# Altium PCB KEYBOARD.PcbDoc
Units mil, origin at the board's own origin, x right, y up, seen from the top; angles counter-clockwise.
Board outline 3860 x 3890 mil, 2 copper layers (Top Layer, Bottom Layer); 62 components, 55 nets, 236 pads, 70 vias.
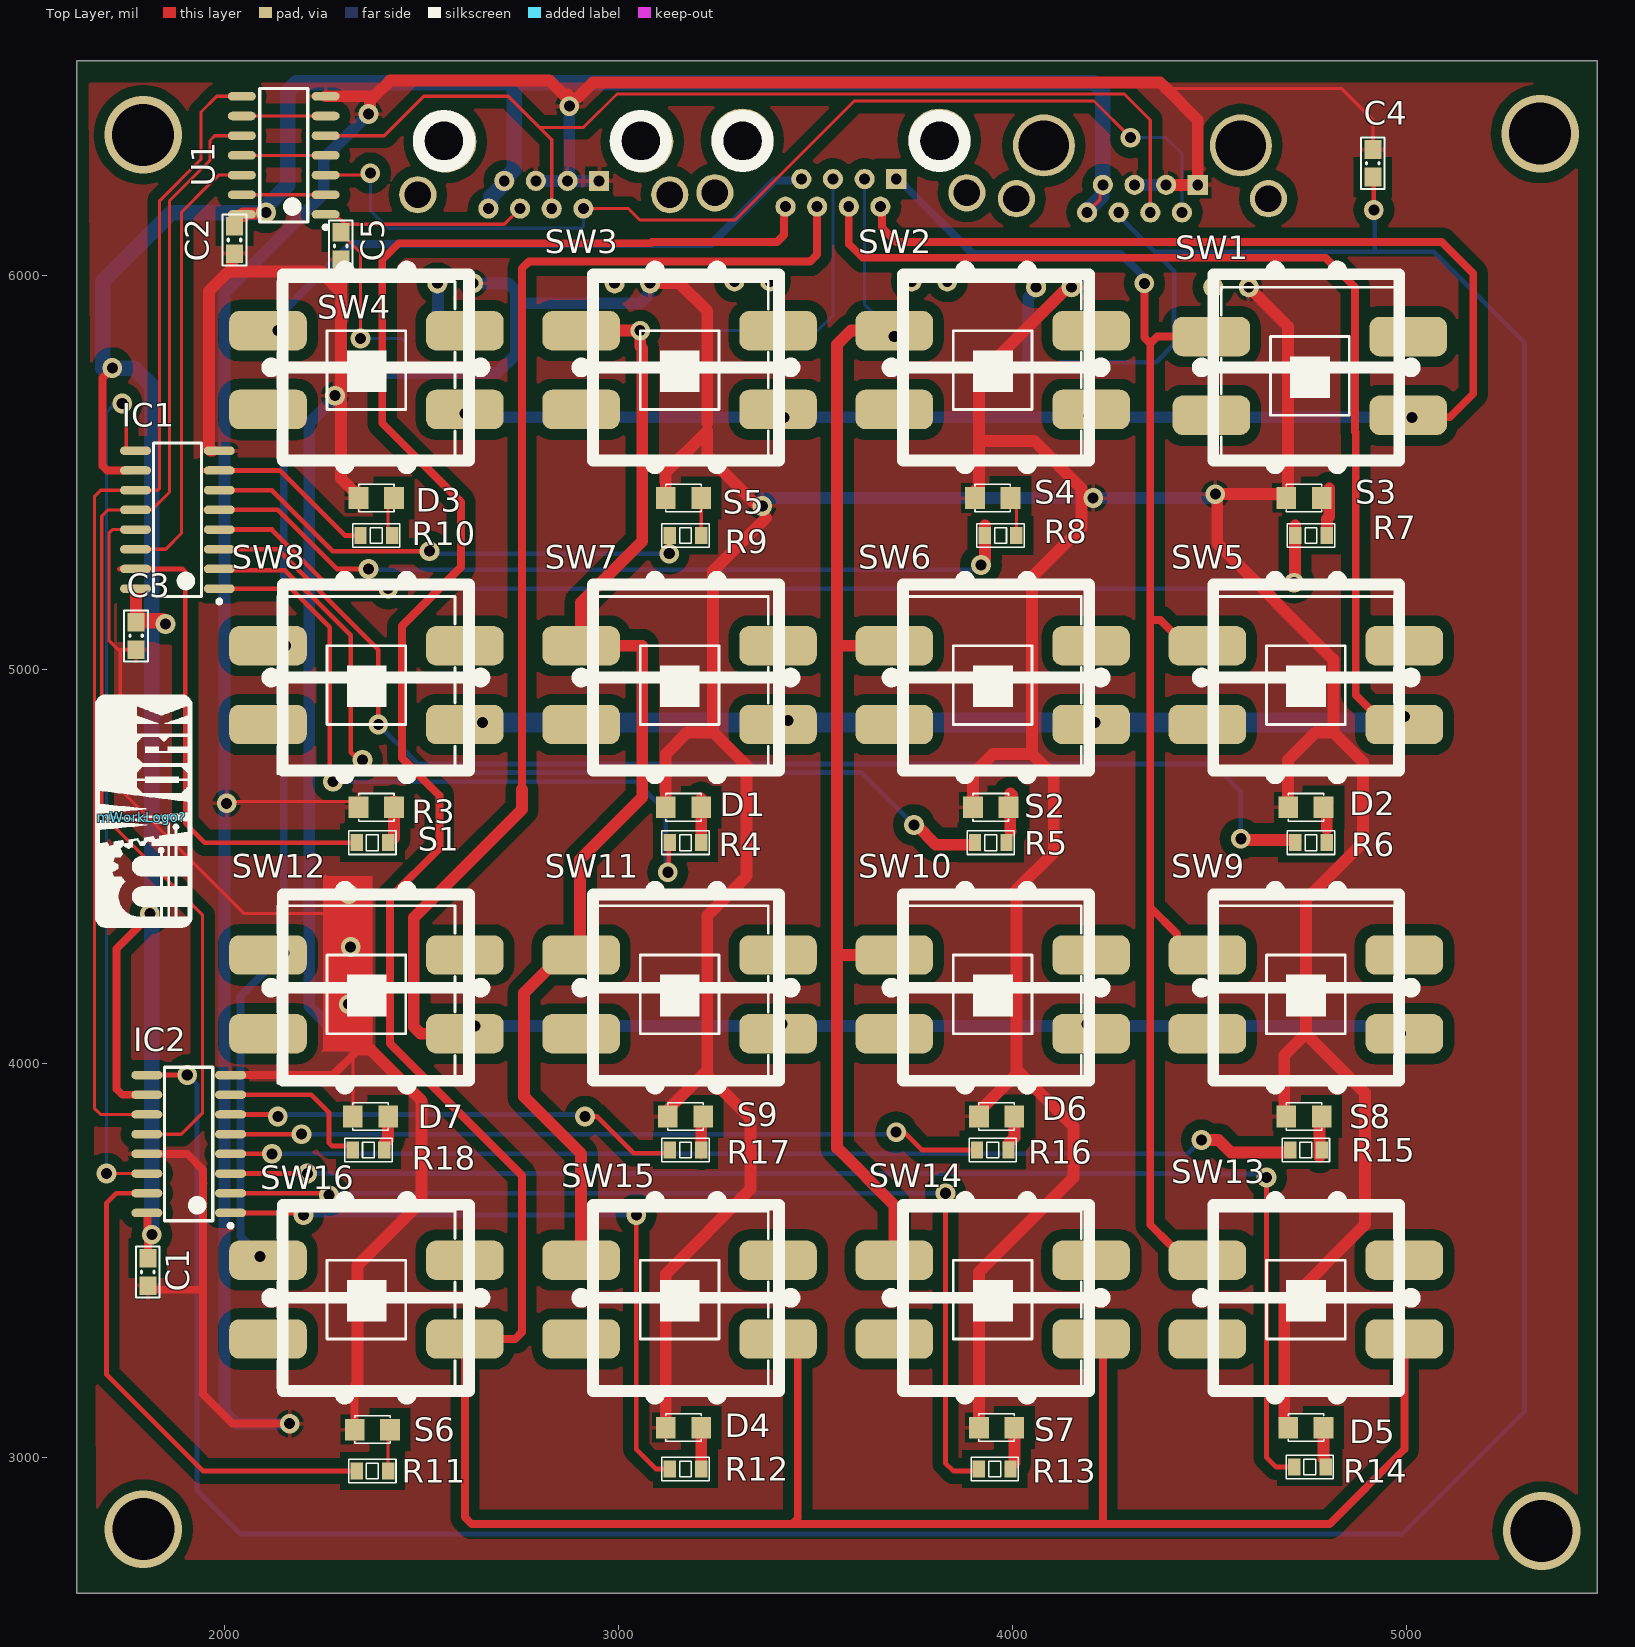
[diagram p0: Top Layer view]
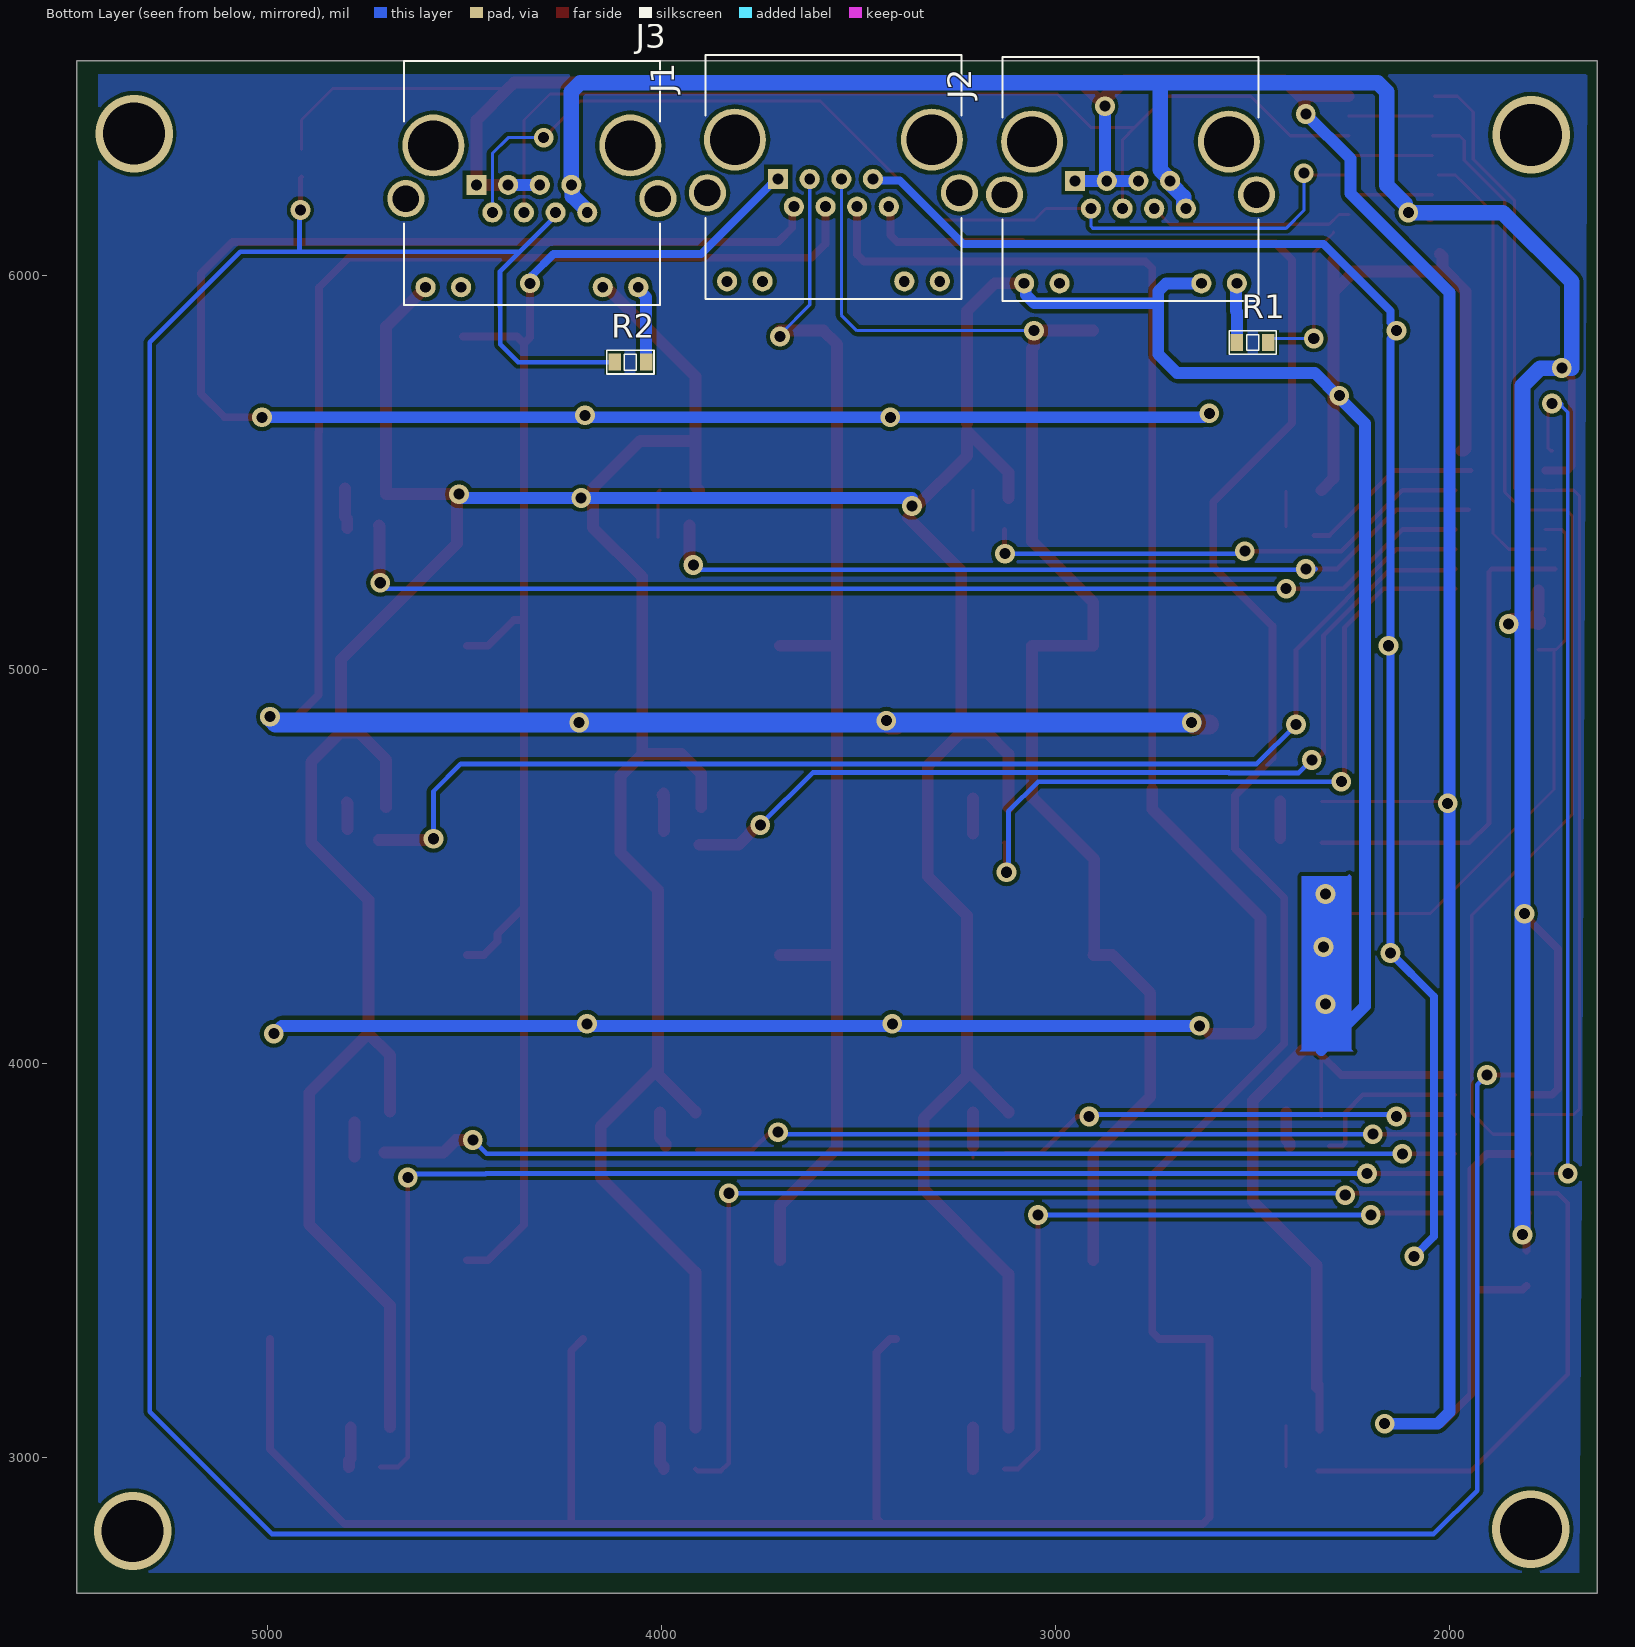
[diagram p1: Bottom Layer view, seen from below]
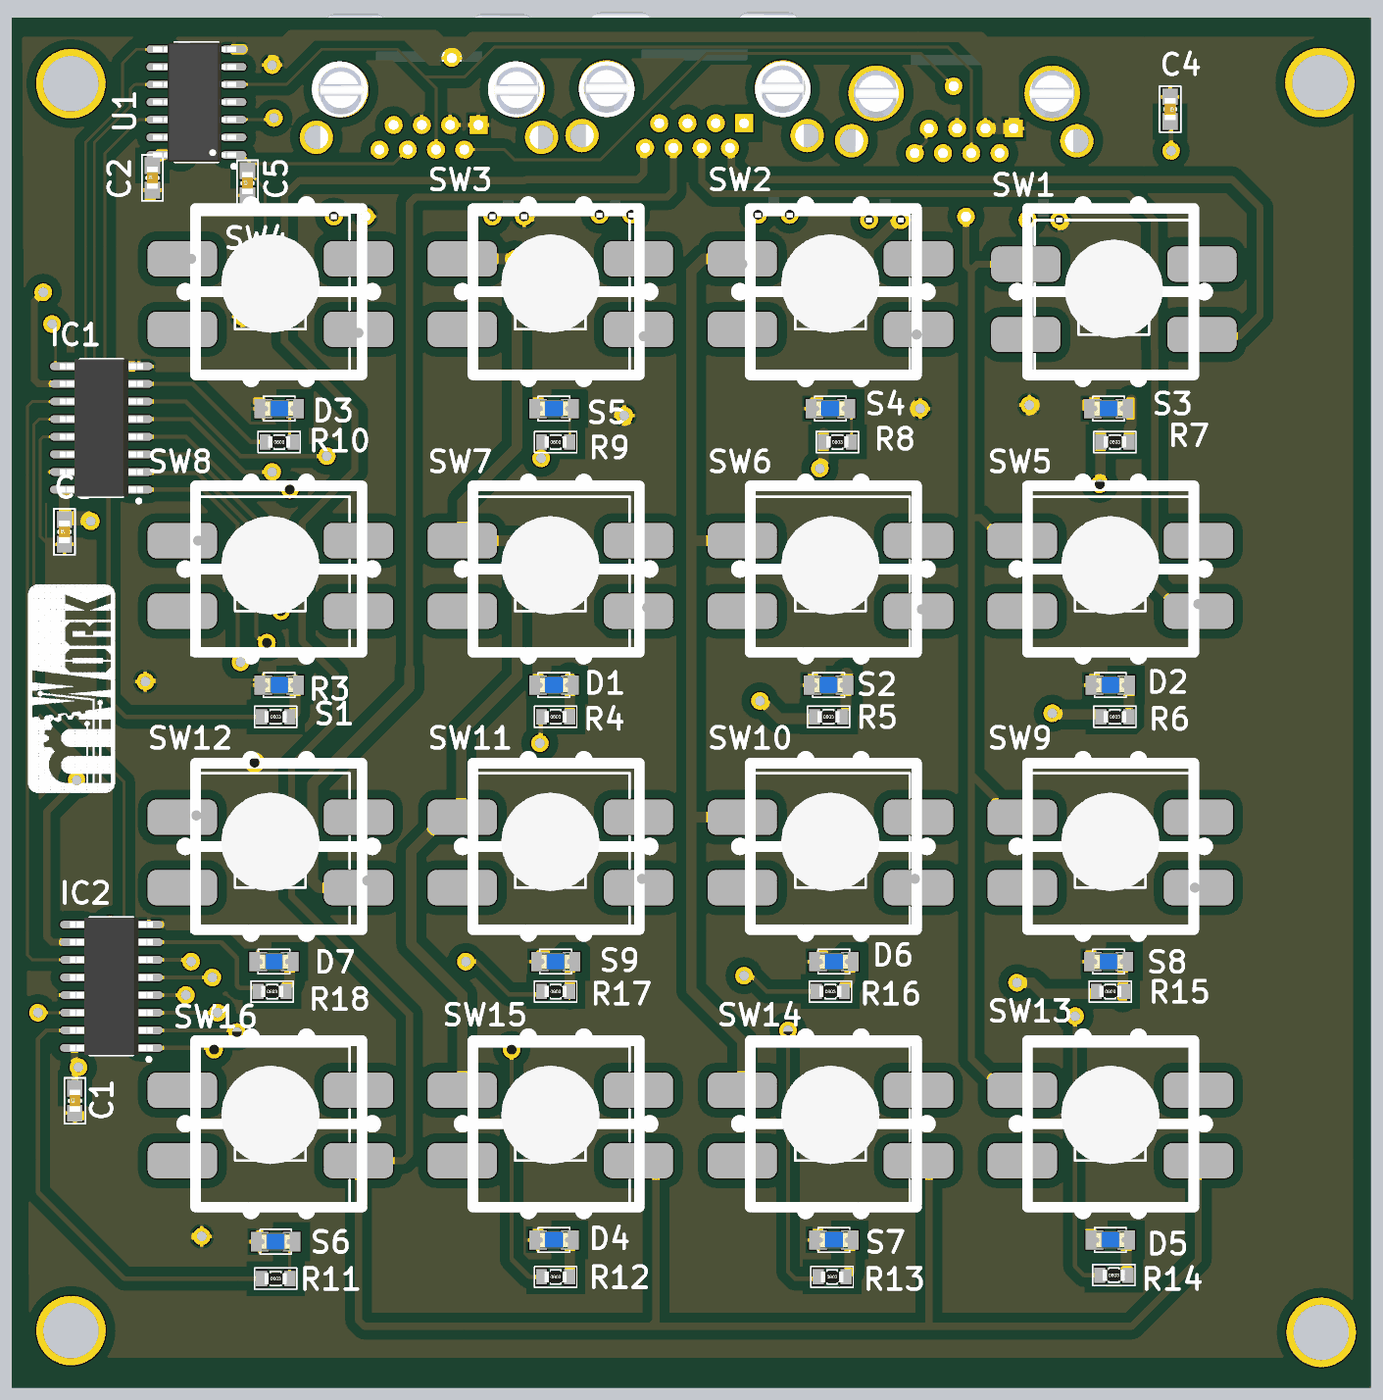
[diagram p2: 3D render of the assembled board from above, using the file's embedded part models]
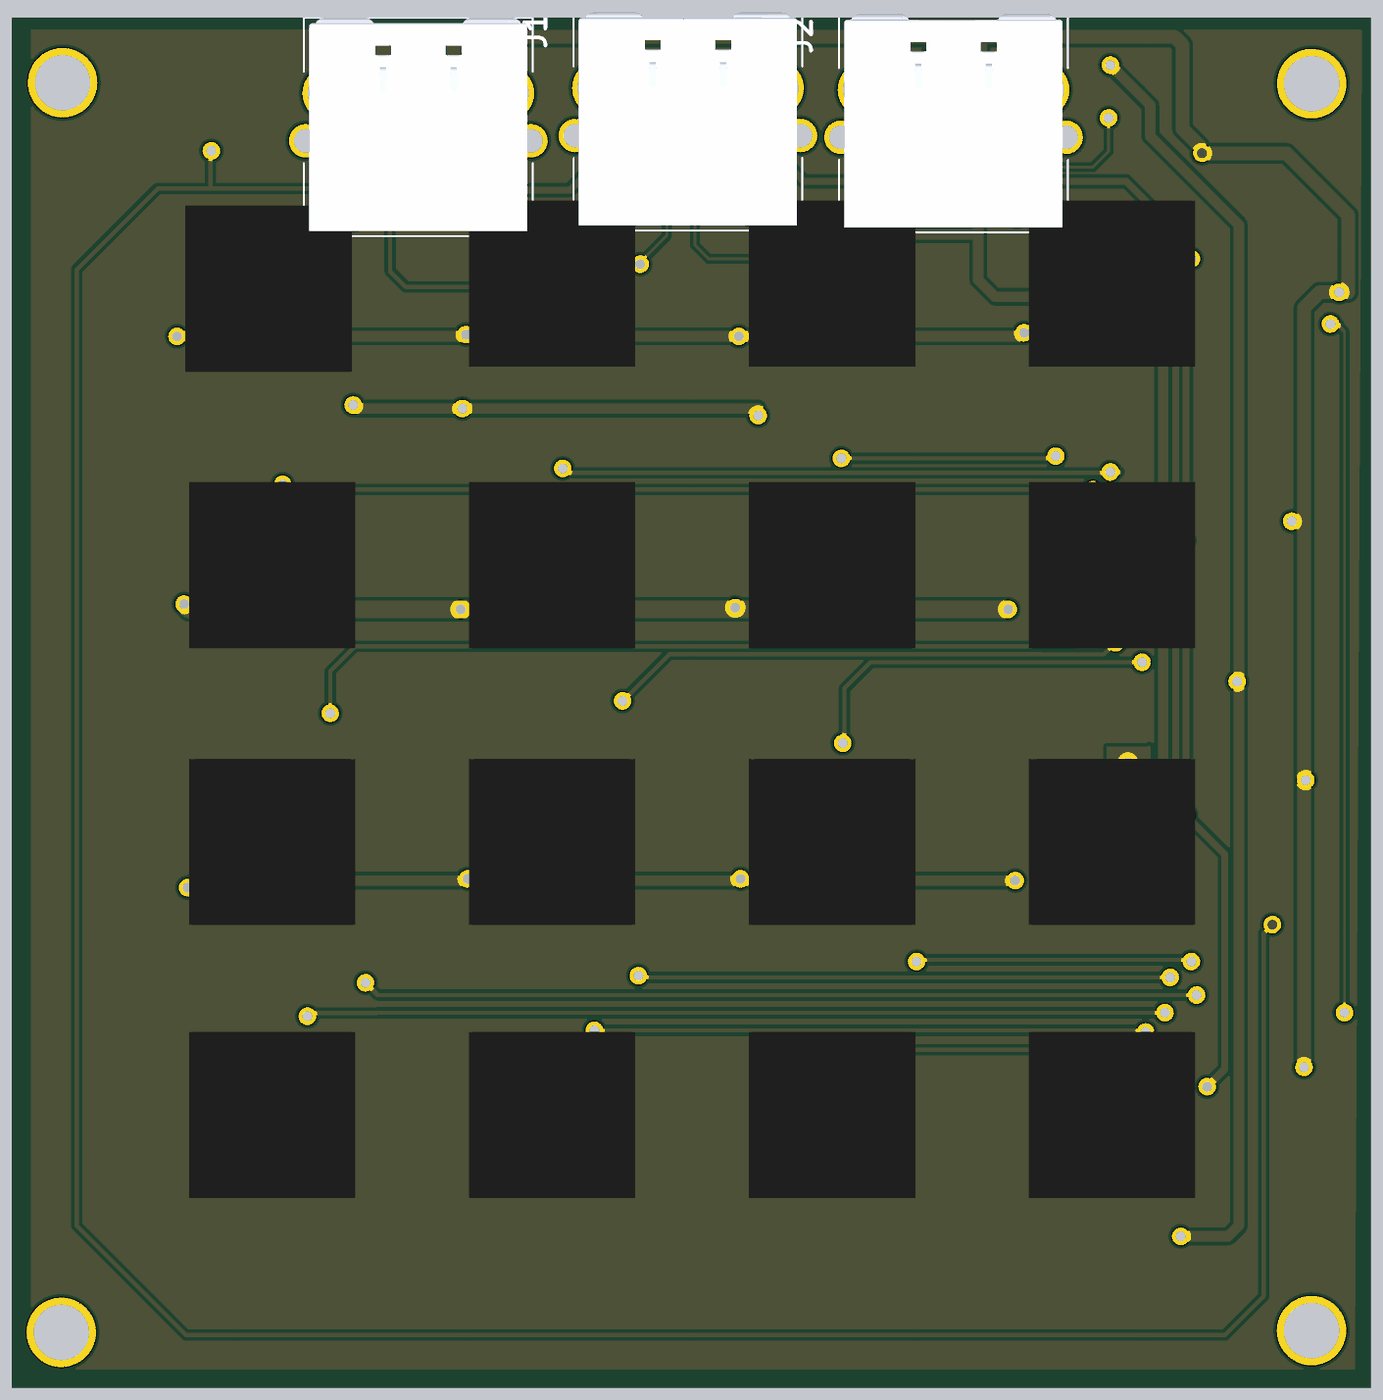
[diagram p3: 3D render of the assembled board from below, using the file's embedded part models]

## Layer stack, top to bottom
Top Solder: solder mask 0.4, Solder Resist, Dk 3.5
Top Layer: signal copper 1.4
Dielectric 1: dielectric 12.6, FR-4, Dk 4.8
Bottom Layer: signal copper 1.4
Bottom Solder: solder mask 0.4, Solder Resist, Dk 3.5

## Board outline
1625,2655 5485,2655 5485,6545 1625,6545

## Design rules (kind name [scope] priority, off if disabled: settings)
Clearance bot [InNamedPolygon('GND_L01_P000')] p1: gap=27.56 ignorepadtopadclearanceinfootprint=FALSE
Clearance [All] p2: gap=10 ignorepadtopadclearanceinfootprint=FALSE except(0: Arc-Hole Track-Hole SMDPad-Hole THPad-Hole Via-Hole Fill-Hole Poly-Hole Region-Hole Text-Hole)
PolygonConnect [All] p1: connectstyle=Relief reliefconductorwidth=10 reliefentries=4 polygonreliefangle="90 Angle" airgapwidth=10
RoomDefinition KEYBOARD [InComponentClass('KEYBOARD')] p1: confinementstyle=ConfineIn formatcopy=TRUE lockcomponents=FALSE outline 5580,2670 8615,2670 8615,4320 5580,4320
RoomDefinition KEYBOARD_1 [InComponentClass('KEYBOARD')] p2: confinementstyle=ConfineIn formatcopy=TRUE lockcomponents=FALSE outline 7045,1060 7320,1060 7320,1570 7045,1570
RoutingVias [All] p1: holewidth=28 width=50 viastyle="Through Hole" minholewidth=28 minwidth=50 maxholewidth=28 maxwidth=50
SolderMaskExpansion [All] p1: expansion=4 istentingtop=FALSE
Width [All] p1: maxlimit=100 minlimit=8 preferedwidth=40
30 further rules are at their usual default settings.

## Classes and differential pairs
component class KEYBOARD: SW1 SW2 SW3 SW4 SW5 SW6 SW7 SW8 SW9 SW10 SW11 SW12 SW13 SW14 SW15 SW16

## Components (designator, comment, footprint, x,y, rotation, side; value= is the part's Value field where it differs from the comment)
C1 "CN" CN-SMD-0603_big 1805,3470 r90 top value=33pF
C2 "CN" CN-SMD-0603_big 2025,6090 r90 top value=33pF
C3 "CN" CN-SMD-0603_big 1775,5085 r90 top value=33pF
C4 "CN" CN-SMD-0603_big 4915,6285 r270 top value=33pF
C5 "CN" CN-SMD-0603_big 2295,6075 r90 top value=33pF
D1 "LED" LED-0805-Blue 3210,4650 r180 top value="LED 3 - 5 ly 2 Colour"
D2 "LED" LED-0805-Blue 4790,4650 r180 top value="LED 3 - 5 ly 2 Colour"
D3 "LED" LED-0805-Blue 2430,5435 r180 top value="LED 3 - 5 ly 2 Colour"
D4 "LED" LED-0805-Blue 3210,3075 r180 top value="LED 3 - 5 ly 2 Colour"
D5 "LED" LED-0805-Blue 4790,3075 r180 top value="LED 3 - 5 ly 2 Colour"
D6 "LED" LED-0805-Blue 4005,3865 r180 top value="LED 3 - 5 ly 2 Colour"
D7 "LED" LED-0805-Blue 2415,3865 r180 top value="LED 3 - 5 ly 2 Colour"
IC1 "74HC595" SO16 1880,5380 r180 top
IC2 "74HC595" SO16 1908.7,3795 r180 top
J1 "615008142121" RJ45_8P8C 3564.45,6249.92 r0 bottom locked
J2 "615008142121" RJ45_8P8C 2810.24,6245 r0 bottom locked
J3 "615008142121" RJ45_8P8C 4330,6235 r0 bottom locked
mWorkLogo? "LogoMwork" LogoMwork15*6 1790,4625 r90 top
R1 "R" RES-SMD-0603_BIG 2500,5830 r180 bottom
R2 "R" RES-SMD-0603_BIG 4080,5780 r0 bottom
R3 "R" RES-SMD-0603_BIG 2375,4560 r0 top
R4 "R" RES-SMD-0603_BIG 3170,4560 r0 top
R5 "R" RES-SMD-0603_BIG 3945,4560 r0 top
R6 "R" RES-SMD-0603_BIG 4757.97,4560 r0 top
R7 "R" RES-SMD-0603_BIG 4757.97,5340 r0 top
R8 "R" RES-SMD-0603_BIG 3970,5340 r0 top
R9 "R" RES-SMD-0603_BIG 3170,5340 r0 top
R10 "R" RES-SMD-0603_BIG 2385,5340 r0 top
R11 "R" RES-SMD-0603_BIG 2375,2965 r0 top
R12 "R" RES-SMD-0603_BIG 3170,2970 r0 top
R13 "R" RES-SMD-0603_BIG 3955,2970 r0 top
R14 "R" RES-SMD-0603_BIG 4755,2975 r0 top
R15 "R" RES-SMD-0603_BIG 4745,3780 r0 top
R16 "R" RES-SMD-0603_BIG 3950,3780 r0 top
R17 "R" RES-SMD-0603_BIG 3170,3780 r0 top
R18 "R" RES-SMD-0603_BIG 2365,3780 r0 top
S1 "LED" LED-0805-Blue 2430,4650 r180 top value="LED 3 - 5 ly 2 Colour"
S2 "LED" LED-0805-Blue 3990,4650 r180 top value="LED 3 - 5 ly 2 Colour"
S3 "LED" LED-0805-Blue 4785,5435 r180 top value="LED 3 - 5 ly 2 Colour"
S4 "LED" LED-0805-Blue 3995,5435 r180 top value="LED 3 - 5 ly 2 Colour"
S5 "LED" LED-0805-Blue 3210,5435 r180 top value="LED 3 - 5 ly 2 Colour"
S6 "LED" LED-0805-Blue 2420,3070 r180 top value="LED 3 - 5 ly 2 Colour"
S7 "LED" LED-0805-Blue 4005,3075 r180 top value="LED 3 - 5 ly 2 Colour"
S8 "LED" LED-0805-Blue 4785,3865 r180 top value="LED 3 - 5 ly 2 Colour"
S9 "LED" LED-0805-Blue 3215,3865 r180 top value="LED 3 - 5 ly 2 Colour"
SW1 "SW" SW4B_SMD 5005,5845 r180 top locked value="Button chip 4 pin"
SW2 "SW" SW4B_SMD 4200,5860 r180 top locked value="Button chip 4 pin"
SW3 "SW" SW4B_SMD 3405,5860 r180 top locked value="Button chip 4 pin"
SW4 "SW" SW4B_SMD 2610,5860 r180 top locked value="Button chip 4 pin"
SW5 "SW" SW4B_SMD 4995,5060 r180 top locked value="Button chip 4 pin"
SW6 "SW" SW4B_SMD 4200,5060 r180 top locked value="Button chip 4 pin"
SW7 "SW" SW4B_SMD 3405,5060 r180 top locked value="Button chip 4 pin"
SW8 "SW" SW4B_SMD 2610,5060 r180 top locked value="Button chip 4 pin"
SW9 "SW" SW4B_SMD 4995,4275 r180 top locked value="Button chip 4 pin"
SW10 "SW" SW4B_SMD 4200,4275 r180 top locked value="Button chip 4 pin"
SW11 "SW" SW4B_SMD 3405,4275 r180 top locked value="Button chip 4 pin"
SW12 "SW" SW4B_SMD 2610,4275 r180 top locked value="Button chip 4 pin"
SW13 "SW" SW4B_SMD 4995,3500 r180 top locked value="Button chip 4 pin"
SW14 "SW" SW4B_SMD 4200,3500 r180 top locked value="Button chip 4 pin"
SW15 "SW" SW4B_SMD 3405,3500 r180 top locked value="Button chip 4 pin"
SW16 "SW" SW4B_SMD 2610,3500 r180 top locked value="Button chip 4 pin"
U1 "7414" SO14 2150,6305 r180 top

## Footprints (in the part's own frame and the unit in brackets; to place one, negate y for a bottom-side part, rotate by r counter-clockwise, add the part's x,y. Pads: shape width x height; smd on the part's side, far side on the other; paste and mask are expansions set on the pad)
CN-SMD-0603_big [mm]
  rect 1.2x1.1 smd: 1(-0.889,0) 2(0.889,0)
  silkscreen extent -1.65,-0.76 1.65,0.76, body extent -0.8,-0.4 0.8,0.4, height 0.3
LED-0805-Blue [mil]
  rect 50x55 smd: 1(0,0) 2(90,0)
  silkscreen extent 0,-35 90,35, body extent 5,-25 85,25, height 43
LogoMwork15*6 [mil] "15mm*6mm"
  silkscreen extent -281,-128 311,118
RES-SMD-0603_BIG [mm]
  rect 0.8x1.1 smd: 1(-1.016,0) 2(1.016,0)
  silkscreen extent -1.52,-0.76 1.52,0.76, body extent -0.8,-0.4 0.8,0.4, height 0.43
RJ45_8P8C [mm] "https://www.thegioiic.com/products/cong-rj45-cai-8pin-8p8c-co-led-16x16mm"
  rect 1.3x1.3 hole 0.7: 1(3.57,0.125)
  round 1.3 hole 0.7: 2(2.55,1.905) 3(1.53,0.125) 4(0.51,1.905) 5(-0.51,0.125) 6(-1.53,1.905) 7(-2.55,0.125) 8(-3.57,1.905) L1+(4.57,6.725) L1-(6.86,6.725) L2+(-6.86,6.725) L2-(-4.57,6.725)
  round 4 hole 3.25: S1(6.35,-2.415) S2(-6.35,-2.415)
  round 2.4 hole 1.7: S3(-8.125,1.015) S4(8.125,1.015)
  silkscreen extent -8.25,-7.88 8.25,7.88, body extent -7.87,-7.88 7.87,7.51, height 12.84
SO14 [mm] "SOIC, 14-Leads, Body 8.60x3.90mm, Pitch 1.27mm, IPC Medium Density"
  oval 1.8x0.55 smd: 1(-2.7,3.81) 2(-2.7,2.54) 3(-2.7,1.27) 4(-2.7,0) 5(-2.7,-1.27) 6(-2.7,-2.54) 7(-2.7,-3.81) 8(2.7,-3.81) 9(2.7,-2.54) 10(2.7,-1.27) 11(2.7,0) 12(2.7,1.27) 13(2.7,2.54) 14(2.7,3.81)
  silkscreen extent -2.83,-4.3 1.55,4.76, body extent -2.87,-4.3 3.13,4.3, height 1.75
SO16 [mm] "SOIC, 16-Leads, Body 9.90x3.91mm, Pitch 1.27mm, IPC Medium Density"
  oval 2x0.55 smd: 1(-2.7,4.445) 2(-2.7,3.175) 3(-2.7,1.905) 4(-2.7,0.635) 5(-2.7,-0.635) 6(-2.7,-1.905) 7(-2.7,-3.175) 8(-2.7,-4.445) 9(2.7,-4.445) 10(2.7,-3.175) 11(2.7,-1.905) 12(2.7,-0.635) 13(2.7,0.635) 14(2.7,1.905) 15(2.7,3.175) 16(2.7,4.445)
  silkscreen extent -2.83,-4.95 1.55,5.39, body extent -3,-4.95 3,4.95, height 1.4
SW4B_SMD [mm] "SW button 4pin, 450 x 450 mil"
  rrect50% 5x2.54 smd: 1(0,5.08) 2(12.7,0) 3(12.7,5.08) 4(0,0)
  silkscreen extent 0.63,-3.17 12.06,8.26, body extent 0.35,-4.22 12.35,7.78, height 5

## Part data
D1 D2 D3 D4 D5 D6 D7 S1 S2 S3 S4 S5 S6 S7 S8 S9: library part "LED SMD"
IC1 IC2: library part 74595, "8 Bit Serial input - Parallel Output"
J1 J2 J3: library part RJ45_8P8C, "Conn, Rj45 Jack, Shld, 1port, 8p8c, Cat5", Package=None, Availability=Unavailable, MF="WÃ¼rth Elektronik", MP=615008142121, Price=None, SnapEDA_Link=https://www.snapeda.com/parts/615008142121/W%C3%BCrth%20Elektronik/view-part/1118273/?ref=snap
SW1 SW2 SW3 SW4 SW5 SW6 SW7 SW8 SW9 SW10 SW11 SW12 SW13 SW14 SW15 SW16: library part SW4, "Switch button 4 pin"
U1: "IC, M74HC04M, Hex Inverter, SO-14", Text Field1=ST, Text Field2=M74HC04M1R, Text Field3=Mouser, Text Field4=511-M74HC04M, Text Field5=SO-14, Text Field6=.22

## Via types
v1: diameter 50, hole 28, Top Layer to Bottom Layer, 66 vias
v2: diameter 196.85, hole 157.48, Top Layer to Bottom Layer, 4 vias

## Nets (pads, with @x,y where several pads share a name; then routed paths per layer and width w, separated by ;. In a path a pad name is that pad's centre, name@x,y a point inside that pad or via, vN(x,y) a via of type N, cw(c..) or ccw(c..) an arc to the next point about the centre after c; other vN are vias at no path point)
+5: C1.2 C2.2 C3.2 IC1.10 IC1.16 IC2.10 IC2.16 J2.7 J2.8 J3.7 J3.8 U1.14 | length 7375
  Top Layer w8: J3.8 4221.94,6192.49 4221.94,6222.41 J3.7
  Top Layer w20: v1(1715,5765) 1690,5740 1690,5516.72 1701.72,5505 IC1.10@1757.4,5505 ; IC2.16 1802.94,3620 1803.7,3619.24 1803.7,3566.27 1802.43,3565 1805,3562.43 C1.2@1805,3525 ; IC2.10 1740,3920 1725,3935 1725,4290 1810,4375 v1(1810,4380)
  Top Layer w30: IC1.16@1774.54,5200.83 1774.54,5145.46 C3.2@1787.5,5132.5 ; U1.14@2050,6150.83 2045.83,6155 U1.14 2046.2,6157.5 2102.5,6157.5 v1(2105,6160)
  Top Layer w40: C3.2 1775,5121.97 1776.65,5123.62 1841.38,5123.62 v1(1850,5115)
  Bottom Layer w39.37: v1(1815,3565) 1815,5720.05 1770.05,5765 v1(1715,5765) 1690,5765 1690.05,5765.05 1690.05,5984.38 1865.05,6159.38 2104.38,6159.38 v1(2105,6160) ; v1@2112.55,6181.88 2160.05,6229.38 2160.05,6466.94 2183.11,6490 2735,6490 ; J2.8 2669.68,6173.2 2675.59,6179.1 2675.59,6199.42 2703.94,6227.77 2703.94,6230.98 2709.84,6236.88 2709.84,6243.27 2735,6268.43 2735,6490 ; J3.8 4189.45,6163.2 4195.35,6169.1 4195.35,6169.68 4227.35,6201.67 4227.35,6227.82 4229.66,6230.13 4229.66,6466.94 4206.6,6490 2735,6490
COL1: J1.1 SW1.2 SW5.2 SW9.2 SW13.2 | length 3867.3
  Top Layer w20: v1(4335,5980) 4335,5842.43 4350,5827.43 ; SW13.2 4441.16,3500 4401.16,3540 4400,3540 4350,3590 4350,4395.81 ; SW9.2 4451.99,4275 4417.75,4309.24 4417.75,4328.07 4350,4395.81 ; SW5.2 4441.16,5060 4376.16,5125 4350,5125 ; SW1.2 4367.57,5845 4350,5827.43 ; 4350,4395.81 4350,5125 ; 4350,5125 4350,5827.43
  Bottom Layer w20: J1.1 3720.59,6229.41 3725.59,6229.41 3900.13,6054.87 4275.13,6054.87 4329.26,6000.74 4329.26,5985.74 v1(4335,5980)
COL2: J1.3 SW2.2 SW6.2 SW10.2 SW14.2 | length 3267.8
  Top Layer w30: SW14.2 3700,3640 3555,3785 3555,4275 ; SW10.2 3555,4275 ; SW6.2 3560,5060 3555,5055 ; SW2.2 3590,5860 3555,5825 3555,5055 ; 3555,4275 3555,5055
  Bottom Layer w8: J1.3 3624.68,5925.31 3700,5850 v1(3700,5845)
COL3: J1.5 SW3.2 SW7.2 SW11.2 SW15.2 | length 3797.4
  Top Layer w30: SW15.2 2905,3770 2760,3915 2760,4178.43 2856.57,4275 SW11.2 2902.43,4277.57 2902.43,4517.43 3060,4675 3060,5060 SW7.2 2905,5170 3060,5325 3060,5815 3055,5820 v1(3055,5860) SW3.2
  Bottom Layer w8: v1(3055,5860) 3505,5860 3544.37,5899.37 J1.5
COL4: J1.7 SW4.2 SW8.2 SW12.2 SW16.2 | length 3933.8
  Bottom Layer w20: v1(2090,3510) 2040,3560 2040,4170 v1(2150,4280) 2150,5060 2151.17,5061.17 2151.17,5077.97 2150,5079.14 2150,5839.59 2138.83,5850.76 2138.83,5854.59 2144.24,5860 2138.83,5865.41 2138.83,5869.24 2150,5880.41 2150,5910 2320,6080 3235,6080 3395.95,6240.95 3460,6240.95 J1.7
  other v1: 2155,5060 2135,5860
DIR0: IC1.1 R4.1 | length 1826.6
  Top Layer w12: IC1.1 2168.71,5205 2266.86,5106.86 2266.86,4723.14 v1(2275,4715) ; v1(3125,4485) 3127.5,4487.5 3127.5,4557.5 R4.1
  Bottom Layer w12: v1(2275,4715) 3045,4715 3120,4640 3120,4490 v1(3125,4485)
DIR1: IC1.3 R6.1 | length 3219.8
  Top Layer w12: IC1.3 2135,5305 2390,5050 v1(2390,4860)
  Top Layer w30: v1(4580,4570) 4583.35,4566.65 R6.1@4718.72,4566.65
  Bottom Layer w12: v1(2390,4860) 2490,4760 4510,4760 4580,4690 v1(4580,4570)
DIR2: IC1.5 R8.1 | length 2166
  Top Layer w12: IC1.5@1951.3,5405 2135,5405 2285,5255 v1(2365,5255)
  Top Layer w30: v1(3920,5265) 3920,5270.41 3930,5280.41 3930,5365
  Bottom Layer w12: v1@2340,5255 2342.25,5252.75 3902.75,5252.75 3915,5265 v1(3920,5265)
DIR3: IC1.7 R10.1 | length 468.3
  Top Layer w12: 1945,5505 1951.3,5505 1970,5505 2140,5505 2305,5340 R10.1
DIR4: IC2.1 R12.1 | length 1740.6
  Top Layer w12: IC2.1 2195,3620 v1(2200,3615) ; v1(3045,3615) 3045,3020 3095,2970 R12.1
  Bottom Layer w12: v1@2192.18,3615 v1(3045,3615)
DIR5: IC2.3 R14.1 | length 3424.5
  Top Layer w12: IC2.3 v1(2210,3720) ; v1(4645,3710) 4645,3000 4670.03,2974.97 4681.22,2974.97 ; 4681.25,2975 R14.1
  Bottom Layer w12: v1(2210,3720) 4447.02,3720 4448.02,3719 4636,3719 v1(4645,3710)
DIR6: IC2.5 R16.1 | length 1943.1
  Top Layer w12: IC2.5@1987.6,3820 v1(2195,3820) ; v1(3705,3825) 3725,3825 3770,3780 R16.1
  Bottom Layer w12: v1(2195,3820) 3700,3820 v1(3705,3825)
DIR7: IC2.7 R18.1 | length 416.9
  Top Layer w12: IC2.7@1987.6,3920 2220,3920 2265,3875 2265,3797.03 2272.03,3790 2305,3790
GND: C1.1 C2.1 C3.1 C4.1 C5.1 D1.2 D2.2 D3.2 D4.2 D5.2 D6.2 D7.2 IC1.8 IC1.13 IC2.8 IC2.13 J2.1 J2.3 J2.5 J2.L1- J2.L2- J3.1 J3.3 J3.5 J3.L1- J3.L2- S1.2 S2.2 S3.2 S4.2 S5.2 S6.2 S7.2 S8.2 S9.2 U1.7 | length 29568
  Top Layer w8: IC1.13@1757.4,5355 1715,5355 1706,5346 1706,5074 1730,5050 1735,5050 ; C3.1 1735,5050 ; v1(2005,4660) 2010,4665 S1.2@2325,4665 ; D7.2 2325.87,3865.87 2325.87,4020.62 ; 2340.25,4035 2340.25,4295 2340.25,4384.69 2335.57,4380 2050,4380 1735,4695 1735,5050 ; 4390,6475 4835,6475 4915,6395 C4.1
  Top Layer w20: IC2.13 1905,3770 1945,3730 1945,3425 ; C1.1 1815,3425 1945,3425 ; IC2.8 2275.25,3970 2325.87,4020.62 2340.25,4035 ; v1@2173.12,3085 v1(2165,3085) 2020,3085 1945,3160 1945,3425 ; S6.2 2330,3177.5 2330,3185 2337.5,3177.5
  Top Layer w30: IC1.8@1970,5555 1964.17,5555 1960,5559.17 1960,5960 2010.3,6010.3 ; C2.1 2018.35,6048.35 2018.35,6018.35 2010.3,6010.3 ; U1.7 2380,6455 ; C5.1 2295,5958.03 ; D3.2@2325,5455 2295,5485 2295,5958.03 ; 2337.5,3177.5 2337.5,3487.5 2500,3650 2500,3905 2370,4035 2340.25,4035 ; v1(2365,6410) 2368.83,6413.83 2368.83,6443.83 2380,6455 ; v1@2879.27,6450.31 2870.13,6459.46 2860.54,6459.46 2825,6495 2420,6495 2380,6455 ; 2895.31,6450.31 2934.98,6489.98 4375.02,6489.98 4390,6475 4470.55,6394.45 J3.1 J3.3 ; J2.L1- 3154.76,5980.24 3225,5910 3225,5625 ; D4.2 3120,3465 3335,3680 3335,3860 3225,3970 3225,3982.5 ; S9.2@3120,3875 3120,3877.5 3225,3982.5 ; D1.2 3120,4785 3175,4840 3240,4840 ; S5.2 3120,5500 3225,5605 3225,5542.5 v1@3358.75,5408.75 ; 3375,5385 3240,5250 3240,4840 ; S2.2 3900,4735 3950,4785 4050,4785 ; S4.2@3905,5455 3915,5465 3915,5580 ; S7.2 3915,3470 4155,3710 4155,3840 4010,3985 ; D6.2@3915,3875 3915,3877.5 4010,3972.5 4010,3985 ; J3.L2- 4146.03,5966.18 4137.05,5966.18 3915,5744.14 3915,5580 ; 4175,5430 4175,5360 4050,5235 4050,4785 ; 4175,5435 4175,5460 4055,5580 3915,5580 ; v1(4515,5445) 4700,5445 4700,5870.31 J3.L1- ; v1@4520,5425.86 4520,5320 4815,5025 4815,4840 ; D5.2@4690,3076.86 4690,3385 4895,3590 4895,3925 4745,4075 ; S8.2@4690,3877.41 4690,4020 4745,4075 ; D2.2 4700,4770 4770,4840 4815,4840 ; 2010.3,6010.3 2244.7,6010.3 2250,6005 2250,6003.03 2295,5958.03 ; 3225,3982.5 3225,4375 3325,4475 3325,4755 3240,4840 ; 4010,3985 4010,4440 4105,4535 4105,4730 4050,4785 ; 4745,4075 4745,4415 4890,4560 4890,4765 4815,4840
  Bottom Layer w30: v1(2165,3085) 2030,3085 2000,3115 2000,4649.59 2001.17,4650.76 2001.17,4658.83 2000,4660 2000,5956.57 2251.44,6208.01 2251.44,6296.44 v1(2365,6410) ; 2325.87,4034.13 2215,4145 2215,5624.59 2282.5,5692.09 2282.5,5692.5 2342.5,5752.5 2692.5,5752.5 2740,5800 2740,5929.65 ; J2.L2- 2630.55,5980 2720,5980 2740,5960 2740,5929.65 ; J2.5 J2.3 ; v1(2875,6430) 2875,6244.61 J2.3 ; J2.1 J2.3 ; J2.L1- 3076.26,5976.18 3076.26,5951.26 3054.65,5929.65 2740,5929.65 ; v1@3365,5435 v1(4205,5435) 4505,5435 v1(4515,5445) ; J3.5 J3.3
  other v1: 2315,4150 2320,4295 2315,4430 3365,5415 2280,5695
LATCH1: J2.2 J3.2 U1.3 | length 2679.1
  Top Layer w8: U1.3 2365,6255 v1(2370,6260) ; J2.2 3024.93,6170 3054.09,6140.84 3295.84,6140.84 3597.98,6442.98 4207.02,6442.98 v1(4300,6350)
  Bottom Layer w8: v1(2370,6260) 2370,6165 2415,6120 2905.94,6120 2910.63,6124.69 J2.2 ; v1(4300,6350) 4390,6350 4430.39,6309.61 J3.2
MOSI1: C5.2 J2.6 R1.2 U1.1 | length 930.5
  Top Layer w8: U1.1 2280.91,6155 2305.91,6130 2710,6130 J2.6 ; C5.2 2295,6108.03 2345,6058.03 v1(2345,5840)
  Bottom Layer w8: v1(2345,5840) 2450,5840 R1.2
NetC4_2: C4.2 IC2.9 J3.6 R2.2 | length 9354.2
  Top Layer w12: IC2.9 v1(1905,3970) ; C4.2 4917.62,6247.38 v1(4917.62,6166.55)
  Bottom Layer w12: v1(1905,3970) 1930,3945 1930,2915 2040,2805 4990,2805 5300,3115 5300,5830 5070,6060 4920,6060 ; R2.2 4365,5780 4410,5825 4410,5920 4410.67,5920.67 4410.67,6010.67 4361.34,6060 ; J3.6 4269.76,6151.58 4361.34,6060 ; v1@4920,6166.55 4920,6060 ; 4361.34,6060 4920,6060
NetD1_1: D1.1 R4.2 | length 106.7
  Top Layer w8: D1.1@3210,4647.5 D1.1
  Top Layer w30: 3210,4583.35 D1.1@3210,4662.5 ; D1.1@3210,4647.5 D1.1@3210,4672.5
NetD2_1: D2.1 R6.2 | length 67.9
  Top Layer w30: 4797.97,4595 4798.04,4595.07 4798.04,4660.11 D2.1@4800,4662.06
NetD3_1: D3.1 R10.2 | length 90.4
  Top Layer w8: 2415,5362.06 D3.1@2415,5452.5
NetD4_1: D4.1 R12.2 | length 105
  Top Layer w30: R12.2 D4.1
NetD5_1: D5.1 R14.2 | length 102.1
  Top Layer w30: D5.1 4790,2996.19 4794.25,2991.94 4794.25,2975.75 R14.2
NetD6_1: D6.1 R16.2 | length 91.2
  Top Layer w30: R16.2@3990,3790 3990,3795.91 4005,3810.91 D6.1@4005,3875
NetD7_1: D7.1 R18.2 | length 88.8
  Top Layer w30: R18.2@2405.75,3789.67 2405.75,3796.65 2415,3805.91 D7.1@2415,3874.67
NetIC1_9: IC1.9 IC2.14 | length 2195.4
  Top Layer w8: v1(1700,3720) IC2.14 ; IC1.9@1738.7,5555 1743.69,5555 1750,5561.31 1750,5653.63 1740,5663.63 v1(1740,5675)
  Bottom Layer w8: v1(1700,3720) 1700,5653.31 1715,5668.31 v1@1715,5675
NetIC1_11: IC1.11 IC2.11 U1.8 | length 2980.4
  Top Layer w8: IC1.11@1757.4,5453.87 1733.53,5453.87 1732.4,5455 1685,5455 1670,5440 1670,3885 1685,3870 IC2.11 ; IC1.11@1757.4,5455 1830.31,5455 1835,5459.69 1835,6190 1940,6295 1940,6415 1980,6455 U1.8@2037.78,6455
NetIC1_12: IC1.12 IC2.12 U1.10 | length 3003.7
  Top Layer w8: IC2.12 1890,3820 1944,3874 1944,4376 1688,4632 1688,5389.14 1703.86,5405 IC1.12 1815,5405 1860,5450 1860,6189.54 1962.73,6292.27 1962.73,6342.73 1975,6355 U1.10
NetIC1_14: IC1.14 U1.12 | length 1143.1
  Top Layer w8: IC1.14@1757.4,5305 1850,5305 1890,5345 1890,6160 1960,6230 1985,6255 U1.12@2029.55,6255
NetJ1_2: J1.2 SW1.1 SW2.1 SW3.1 SW4.1 | length 4510.2
  Top Layer w20: v1(5015,5640) 5110,5640 5170,5700 5170,6005 5090,6085 3740,6085 3705,6085 3668.9,6121.1 J1.2@3668.9,6165.14 ; J1.2@3668.9,6165.14 3668.9,6170.87 J1.2 3664.84,6169.19 J1.2@3668.9,6165.14
  Bottom Layer w30: v1(2610,5650) 2615.41,5650 2625.41,5640 v1(3420,5640) v1(5015,5640)
  other v1: 4195,5645
NetJ1_4: J1.4 SW5.1 SW6.1 SW7.1 SW8.1 | length 5038.3
  Top Layer w20: J1.4 3584.53,6080.47 3620,6045 4795,6045 4870,5970 4870,5603.43 4871.57,5601.86 4871.57,4935 4946.57,4860 SW5.1
  Top Layer w50: SW8.1 2650,4860 v1(2655,4865) ; SW7.1 3420,4860 v1(3430,4870)
  Bottom Layer w50: v1(2655,4865) v1(4210,4865) 4980,4865 v1(4995,4880)
NetJ1_6: J1.6 SW9.1 SW10.1 SW11.1 SW12.1 | length 5420.4
  Top Layer w20: 2755,4695 2755,6018.17 2772.57,6035.75 3486.64,6035.75 3504.21,6053.32 J1.6
  Top Layer w30: SW12.1 2497.57,4075 2480,4092.57 2480,4370 2755,4645 2755,4695
  Bottom Layer w30: v1(2635,4095) 4965,4095 v1(4985,4075)
  other v1: 3415,4100 4190,4100
NetJ1_8: J1.8 SW13.1 SW14.1 SW15.1 SW16.1 | length 8563.4
  Top Layer w20: SW15.1 3420.76,3300 3455,3265.76 3455,2845 3440,2830 ; J1.8 3419.84,6170.87 3419.84,6102.57 3402.27,6085 3085,6085 3082,6082 2442,6082 2400,6040 2400,5625 2600,5425 2600,5260 2450,5110 2450,4775 2545,4680 2545,4545 2420,4420 2420,4050 2755,3715 2755,3317.57 2737.43,3300 SW16.1 2610,2847.57 2627.57,2830 3440,2830 ; SW14.1 4230,3270 4230,2835 4235,2830 ; SW13.1 4995,3020 4805,2830 4235,2830 ; 3440,2830 4235,2830
NetJ2_L2+: J2.L2+ R1.1 | length 151.8
  Bottom Layer w30: R1.1 2540,5908.02 2541.98,5910 2541.98,5978.41 J2.L2+
NetJ3_L2+: J3.L2+ R2.1 | length 198.5
  Bottom Layer w30: R2.1 4040,5944.58 4059.92,5964.5 J3.L2+
NetR3_2: R3.2 S1.1 | length 93.4
  Top Layer w30: R3.2@2430,4571.6 S1.1@2430,4665
NetR5_2: R5.2 S2.1 | length 97.1
  Top Layer w30: 3994.25,4680.75 3994.25,4590.75 3995,4590 ; 3995,4685 3999.25,4680.75
NetR7_2: R7.2 S3.1 | length 103.4
  Top Layer w30: R7.2@4798.72,5358.35 4798.72,5381.94 4804.56,5387.78 S3.1@4804.56,5459.3
NetR8_2: R8.2 S4.1 | length 122.1
  Top Layer w8: S4.1@4005,5455 4010,5450 4010,5365 R8.2@4010,5335
NetR9_2: R9.2 S5.1 | length 101.6
  Top Layer w8: R9.2@3210,5353.38 S5.1@3210,5455
NetR11_2: R11.2 S6.1 | length 104.6
  Top Layer w8: R11.2@2415,2975 S6.1@2415,3079.63
NetR13_2: R13.2 S7.1 | length 109.1
  Top Layer w30: R13.2 3995,2975.91 4005,2985.91 S7.1
NetR15_2: R15.2 S8.1 | length 118.1
  Top Layer w8: R15.2@4780,3790 4780,3765 R15.2@4785,3760
  Top Layer w30: R15.2@4780,3763.31 4780,3790 S8.1@4780,3849.32
NetR17_2: R17.2 S9.1 | length 105
  Top Layer w8: R17.2@3210,3760 R17.2
  Top Layer w30: R17.2@3210,3790 S9.1@3210,3875
NetU1_2: U1.2 U1.13 | length 212.6
  Top Layer w8: U1.13 U1.2
NetU1_4: U1.4 U1.11 | length 212.6
  Top Layer w8: U1.11 U1.4
NetU1_6: U1.6 U1.9 | length 212.6
  Top Layer w8: U1.9 U1.6
SCK1: J2.4 J3.4 U1.5 | length 2684.4
  Top Layer w8: U1.5 2405,6355 2505,6455 2720,6455 2799,6376 ; J2.4 2830.31,6344.69 2799,6376 ; J3.4 4350.08,6394.92 4284.02,6460.98 2995.98,6460.98 2911,6376 2799,6376
STEP0: IC1.15 R3.1 | length 1253.1
  Top Layer w12: 1732.4,5255 1892.97,5255 1900,5247.97 1900,4610 1950,4560 R3.1@2323.86,4560
STEP1: IC1.2 R5.1 | length 2382.5
  Top Layer w12: IC1.2 1989.45,5251.85 2153.15,5251.85 2208,5197 2209.11,5197 2320,5086.11 2320,4790 2335,4775 2345,4775 v1(2350,4770)
  Top Layer w30: v1(3750,4605) 3755.41,4605 3805.41,4555 R5.1@3905,4555
  Bottom Layer w12: v1(2350,4770) 2383,4737 2560,4737 ; 2560,4738 3617,4738 v1(3750,4605)
STEP2: IC1.4 R7.1 | length 2943.3
  Top Layer w12: IC1.4 2120,5355 2270,5205 v1(2415,5205)
  Top Layer w30: v1(4715,5220) 4717.22,5222.22 4717.22,5364.25 4717.97,5365
  Bottom Layer w12: v1(2415,5205) 4700,5205 v1(4715,5220)
STEP3: IC1.6 R9.1 | length 1271.2
  Top Layer w12: IC1.6 2120,5455 2275,5300 v1(2520,5300) ; v1(3128.75,5293.75) 3130,5295 R9.1 R9.1@3130,5355.2
  Bottom Layer w12: v1(2520,5300) 2526.25,5293.75 v1(3128.75,5293.75)
STEP4: IC2.15 R11.1 | length 1284.2
  Top Layer w12: IC2.15 1725,3670 1700,3645 1700,3210 1945,2965 R11.1
STEP5: IC2.2 R13.1 | length 2597.4
  Top Layer w12: IC2.2 2260,3670 v1(2265,3665) ; v1(3830,3670) 3830,2985 3850,2965 3910,2965 R13.1
  Bottom Layer w12: v1@2265.01,3670 v1(3830,3670)
STEP6: IC2.4 R15.1 | length 2745
  Top Layer w12: IC2.4@1987.6,3770 v1(2120,3770)
  Top Layer w30: v1(4480,3805) 4523.31,3805 4554.96,3773.35 R15.1@4705,3773.35
  Bottom Layer w12: v1(2120,3770) 4445,3770 v1(4480,3805)
STEP7: IC2.6 R17.1 | length 1168.7
  Top Layer w12: IC2.6 2130,3870 v1(2135,3865) ; v1(2915,3865) 2945,3865 3038.28,3771.72 R17.1@3128.28,3771.72
  Bottom Layer w12: v1@2122.4,3870 2910,3870 v1(2915,3865)
pads on no net: J1.L1+ J1.L1- J1.L2+ J1.L2- J1.S1 J1.S2 J1.S3 J1.S4 J2.L1+ J2.S1 J2.S2 J2.S3 J2.S4 J3.L1+ J3.S1 J3.S2 J3.S3 J3.S4 SW1.3 SW1.4 SW2.3 SW2.4 SW3.3 SW3.4 SW4.3 SW4.4 SW5.3 SW5.4 SW6.3 SW6.4 SW7.3 SW7.4 SW8.3 SW8.4 SW9.3 SW9.4 SW10.3 SW10.4 SW11.3 SW11.4 SW12.3 SW12.4 SW13.3 SW13.4 SW14.3 SW14.4 SW15.3 SW15.4 SW16.3 SW16.4
copper on no net:
  other v2: 5343.73,2812.51 1793.73,2817.51 1793.27,6357.29 5340,6360

## Polygon pours and split planes (outlines as drawn)
no net on Bottom Layer "NONET_L02_P001" (solid, pour order 1): 1650.39,6511.5 5430.39,6511.5 5430.39,2701.5 5425.39,2706.5 1670.39,2706.5
GND on Top Layer "GND_L01_P000" (solid, pour order 0): 1655.13,6490 5435,6490 5435,2705 5400,2740 1674.84,2740

## Other copper
Top Layer:
  region net GND: 2380,4030 2375,4035 2375,4475 2260,4475 2255,4480 2250,4475 2250,4035 2245,4030
Bottom Layer:
  region net GND: 2380,4030 2375,4035 2375,4475 2260,4475 2255,4480 2250,4475 2250,4035 2245,4030

## Silkscreen, mask and mechanical layers (free items; w line width, h text height)
Top Overlay:
  drawing of 180 lines, arcs and shapes, not listed
Mechanical 1:
  lines w19.68: 1630,2655 1630,6540 5485,6540 5485,2655 1630,2655

## Dimensions
5485,2655 to 5485,6545 on Top Layer